# Altium PCB ToolDoorController.PcbDoc
Units mil, origin at the board's own origin, x right, y up, seen from the top; angles counter-clockwise.
Board outline 1968.5 x 3937.01 mil, 2 copper layers (Top Layer, Bottom Layer); 37 components, 64 nets, 298 pads, 301 vias.
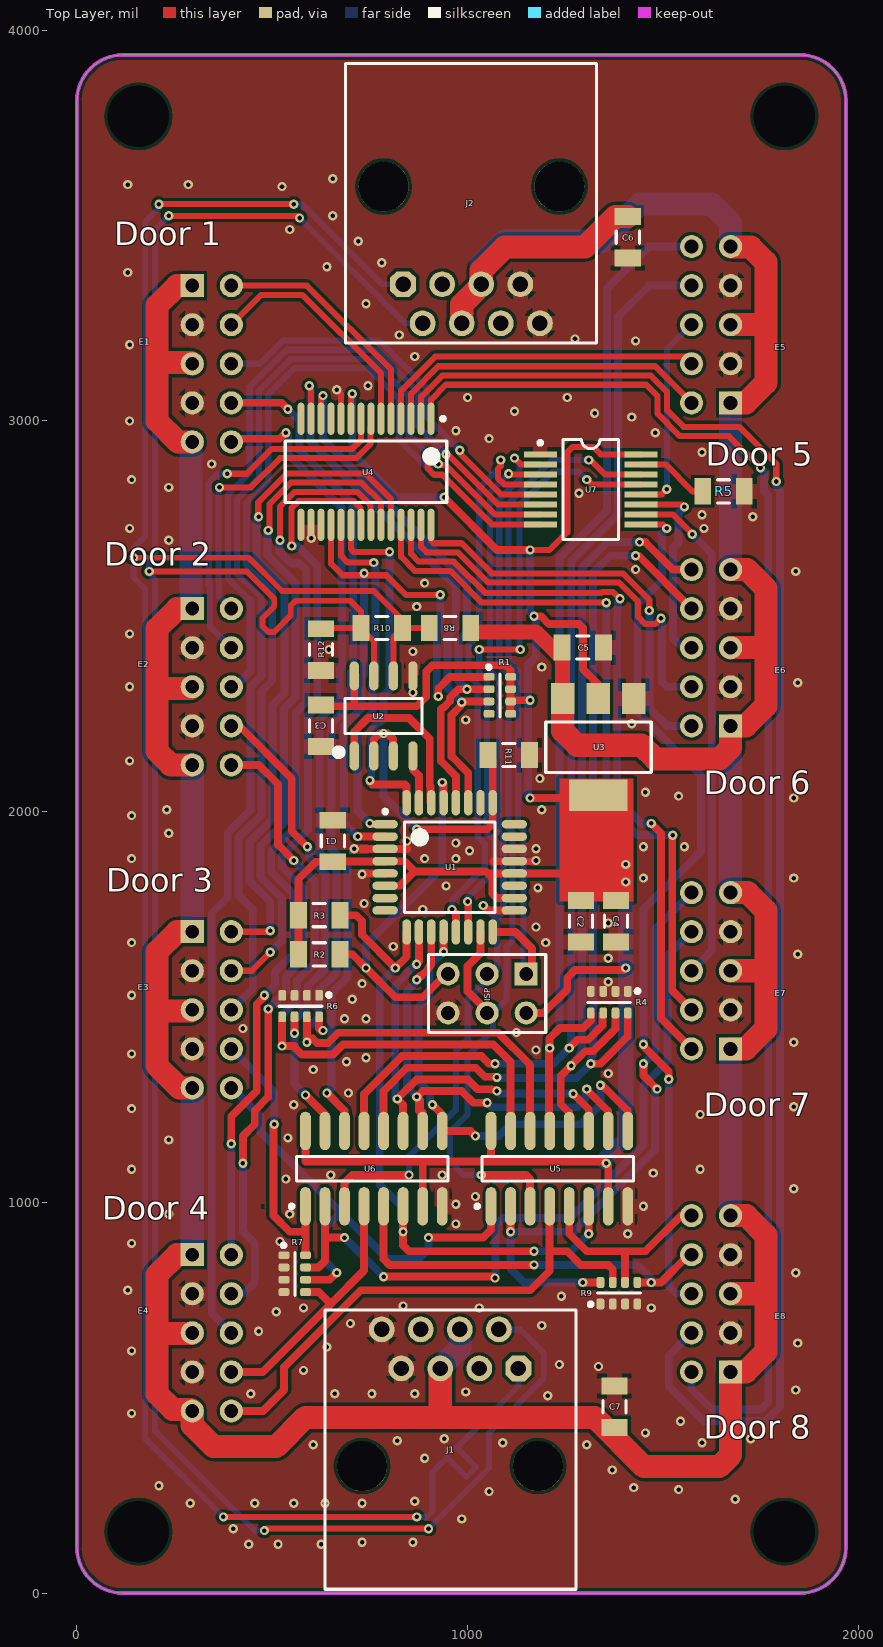
[diagram p0: Top Layer view]
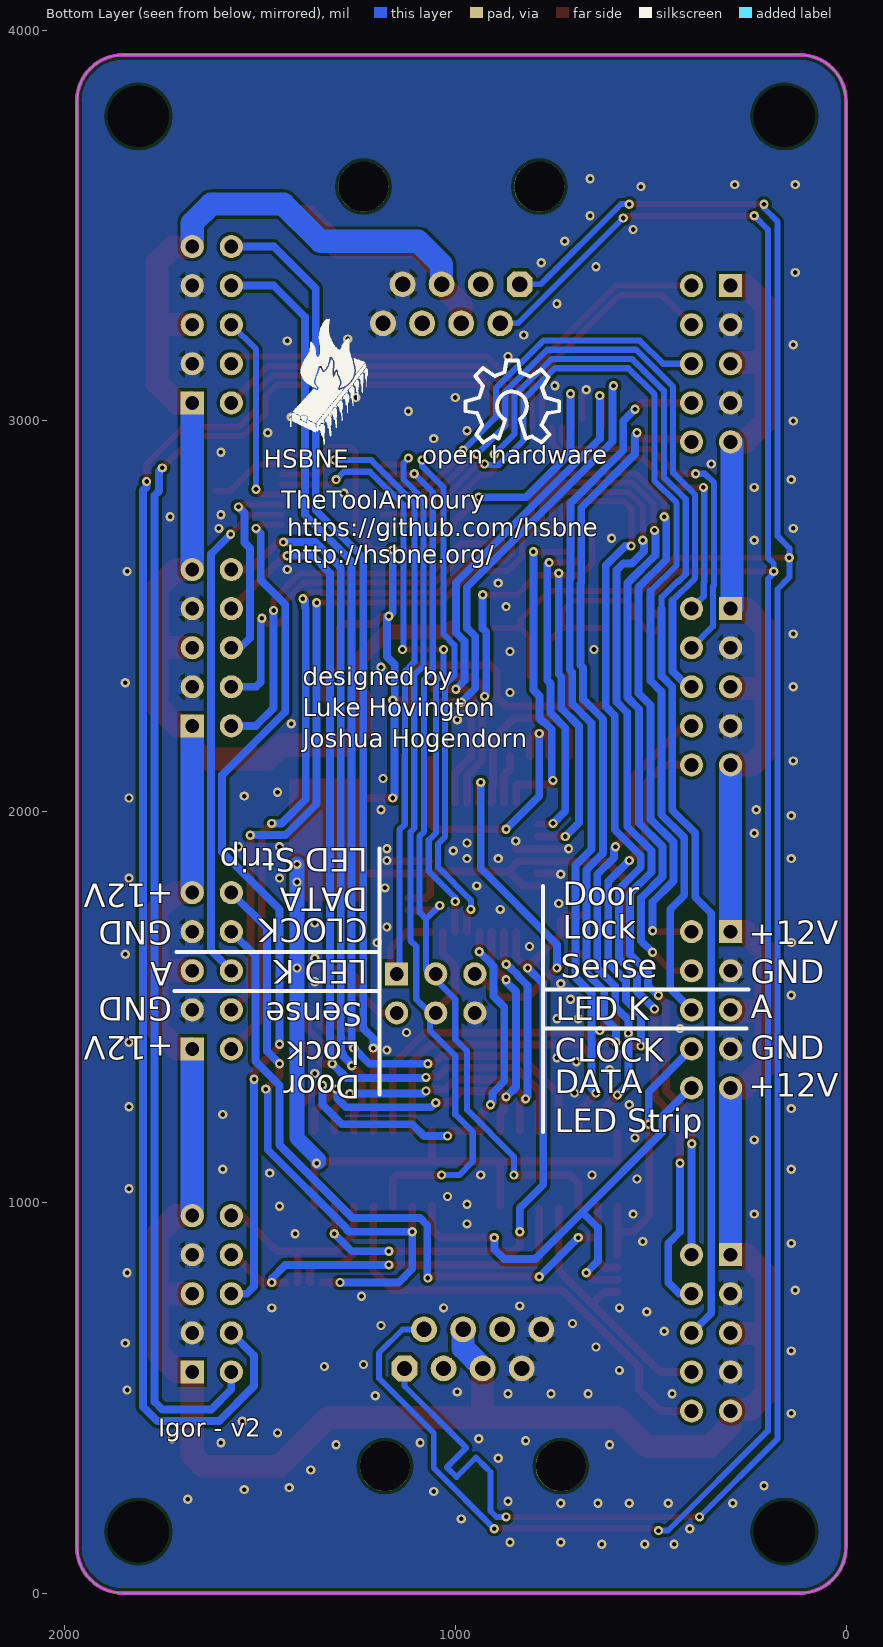
[diagram p1: Bottom Layer view, seen from below]

## Layer stack, top to bottom
Top Solder: solder mask 0.4, Solder Resist, Dk 3.5
Top Layer: signal copper 1.4
Dielectric1: dielectric 12.6, FR-4, Dk 4.8
Bottom Layer: signal copper 1.4
Bottom Solder: solder mask 0.4, Solder Resist, Dk 3.5

## Board outline
118.11,0 cw(c118.11,118.11) 0,118.11 0,3818.9 cw(c118.11,3818.9) 118.11,3937.01 1850.39,3937.01 cw(c1850.39,3818.9) 1968.5,3818.9 1968.5,118.11 cw(c1850.39,118.11) 1850.39,0

## Design rules (kind name [scope] priority, off if disabled: settings)
Clearance [All] p1: gap=7.87
DiffPairsRouting [All] p1: maxlimit=10 minlimit=10 mostfreqgap=10 toplayer_minwidth=15 toplayer_maxwidth=15 toplayer_prefwidth=15 bottomlayer_minwidth=15 bottomlayer_maxwidth=15 bottomlayer_prefwidth=15 maxuncoupledlength=500
HoleSize [All] p1: absolutevalues=TRUE maxlimit=157.48 minlimit=11.81 maxpercent=80.000 minpercent=20.000
MatchedLengths [InDifferentialPair('RS485')] p1: tolerance=78.74 checknetsindiffpair=FALSE checkdiffpairvsdiffpair=TRUE checkxsignals=TRUE checkothers=TRUE
MinimumSolderMaskSliver [(InComponent('U1') OR InComponent('U4') OR InComponent('Y1'))] p1: minsoldermaskwidth=1.77
MinimumSolderMaskSliver MinimumSolderMaskSliver_1 [All] p2: minsoldermaskwidth=9.84
PolygonConnect PolygonConnect_1 [isvia] p1: connectstyle=Direct reliefconductorwidth=10 reliefentries=4 polygonreliefangle="90 Angle" airgapwidth=10
PolygonConnect [All] p2: connectstyle=Relief reliefconductorwidth=39.37 reliefentries=4 polygonreliefangle="90 Angle" airgapwidth=10
RoutingVias [All] p1: holewidth=11.81 width=19.68 viastyle="Through Hole" minholewidth=7.87 minwidth=19.68 maxholewidth=28 maxwidth=50
SilkToSolderMaskClearance [IsPad] p1 off: minsilkscreentomaskgap=10 clearancetoexposedcopper=TRUE
SolderMaskExpansion [All] p1: expansion=4
Width [All] p1: maxlimit=59.06 minlimit=10 preferedwidth=20 minimp=50.000000 maximp=50.000000 favimp=50.000000
26 further rules are at their usual default settings.

## Classes and differential pairs
component class Connectors: E1 E2 E3 E4 E5 E6 E7 E8 J1 J2
component class ToolDoorController: C1 C2 C3 C4 C5 C6 C7 ISP J3 R1 R2 R3 R4 R5 R6 R7 R8 R9 R10 R11 R12 U1 U2 U3 U4 U5 U6 U7
differential pair RS485: +RS485_P -RS485_N

## Components (designator, comment, footprint, x,y, rotation, side; value= is the part's Value field where it differs from the comment)
C1 "100nF" C1206 655,1925 r270 top
C2 "100nF" C1206 1290,1720 r90 top
C3 "100nF" C1206 625,2220 r90 top
C4 "1uF" C1206 1380,1720 r90 top
C5 "1uF" C1206 1295,2420 r180 top
C6 "100nF" C1206 1410,3470 r90 top
C7 "100nF" C1206 1375.76,477.21 r270 top
E1 "Header 2x5" 2X5 295.28,3346.46 r0 top locked
E2 "Header 2x5" 2X5 295.28,2519.68 r0 top locked
E3 "Header 2x5" 2X5 295.28,1692.91 r0 top locked
E4 "Header 2x5" 2X5 295.28,866.14 r0 top locked
E5 "Header 2x5" 2X5 1673.23,3046.46 r180 top locked
E6 "Header 2x5" 2X5 1673.23,2219.68 r180 top locked
E7 "Header 2x5" 2X5 1673.23,1392.91 r180 top locked
E8 "Header 2x5" 2X5 1673.23,566.14 r180 top locked
ISP "ISP" HDR2X3 1150,1585 r180 top
J1 "rs485" RJ45 955,325 r0 top
J2 "rs485" RJ45 1010,3600 r180 top
R1 "10K" SO8_S 1055,2345 r0 top
R2 "10K" C1206 620,1635 r180 top
R3 "10K" C1206 620,1735 r180 top
R4 "10K" SO8_S 1410,1540 r270 top
R5 "?K" C1206 1655,2820 r180 top
R6 "10K" SO8_S 620,1530 r270 top
R7 "10K" SO8_S 530,865 r0 top
R8 "390R" C1206 955,2470 r0 top
R9 "10K" SO8_S 1340,740 r90 top
R10 "220R" C1206 780,2470 r0 top
R11 "10K" C1206 1105,2145 r180 top
R12 "390R" C1206 625,2415 r90 top
U1 "ATmega8-16AC" 32A_N 954.25,1857.63 r0 top
U2 "MAX14770EESA+" 8S1_L 785,2245 r90 top
U3 "AZ1117EH-5" SOT-223 1425,2290 r180 top
U4 "MCP23017T-E/SS" SSOP-SS28_N 740,2870 r270 top
U5 "8-channel multiplexer" 16S1_M 1060,990 r90 top
U6 "8-channel multiplexer" 16S1_M 585,990 r90 top
U7 "TLC5916IDR" DB016 1315,2825 r270 top

## Footprints (in the part's own frame and the unit in brackets; to place one, negate y for a bottom-side part, rotate by r counter-clockwise, add the part's x,y. Pads: shape width x height; smd on the part's side, far side on the other; paste and mask are expansions set on the pad)
2X5 [mm]
  rect 1.5x1.5 hole 0.9: 1(0,0)
  round 1.5 hole 0.9: 2(0,-2.54) 3(0,-5.08) 4(0,-7.62) 5(0,-10.16) 6(2.54,0) 7(2.54,-2.54) 8(2.54,-5.08) 9(2.54,-7.62) 10(2.54,-10.16)
  body extent -9.74,-8.51 2.89,1.25, height 5.79
8S1_L [mm] "SOIC, 8-Leads, Body 4.9x3.9mm, Pitch 1.27mm, IPC High Density"
  oval 1.9x0.6 smd: 1(-2.604,1.905) 2(-2.604,0.635) 3(-2.604,-0.635) 4(-2.604,-1.905) 5(2.604,-1.905) 6(2.604,-0.635) 7(2.604,0.635) 8(2.604,1.905)
  silkscreen extent -2.56,-2.5 1.14,3.12, body extent -2,-2.5 2,2.5, height 1.75
16S1_M [mm] "SOIC, 14-Leads, Body 8.7x3.9mm, Pitch 1.27mm, IPC Low Density"
  oval 2.5x0.7 smd: 1(0,0) 2(0,-1.27) 3(0,-2.54) 4(0,-3.81) 5(0,-5.08) 6(0,-6.35) 7(0,-7.62) 8(0,-8.89) 9(4.9,-8.89) 10(4.9,-7.62) 11(4.9,-6.35) 12(4.9,-5.08) 13(4.9,-3.81) 14(4.9,-2.54) 15(4.9,-1.27) 16(4.9,0)
  silkscreen extent -0.12,-9.27 3.25,1.02, body extent 0.45,-9.4 4.45,0.57, height 1.75
32A_N [mm] "Thin QFP, 32-Leads, Body 7x7mm, Pitch 0.8mm, IPC Medium Density"
  oval 1.65x0.55 smd: 1(-4.2,2.8) 2(-4.2,2) 3(-4.2,1.2) 4(-4.2,0.4) 5(-4.2,-0.4) 6(-4.2,-1.2) 7(-4.2,-2) 8(-4.2,-2.8) 17(4.2,-2.8) 18(4.2,-2) 19(4.2,-1.2) 20(4.2,-0.4) 21(4.2,0.4) 22(4.2,1.2) 23(4.2,2) 24(4.2,2.8)
  oval 0.55x1.65 smd: 9(-2.8,-4.2) 10(-2,-4.2) 11(-1.2,-4.2) 12(-0.4,-4.2) 13(0.4,-4.2) 14(1.2,-4.2) 15(2,-4.2) 16(2.8,-4.2) 25(2.8,4.2) 26(2,4.2) 27(1.2,4.2) 28(0.4,4.2) 29(-0.4,4.2) 30(-1.2,4.2) 31(-2,4.2) 32(-2.8,4.2)
  silkscreen extent -4.32,-2.95 2.95,3.75, body extent -3.5,-3.5 3.5,3.5, height 1.2
C1206 [mm] "Chip Capacitor, Body 3.2x1.6mm, IPC High Density"
  rect 1.1x1.7 smd: 1(-1.35,0) 2(1.35,0)
  silkscreen extent -0.4,-0.75 0.4,0.75, body extent -1.7,-0.9 1.7,0.9, height 1.3
DB016 [mm] "SSOP, Plastic; 16 Leads; Body Width 5.3 mm; Pitch 0.65 mm"
  rect 0.4x2.15 smd: 1(-2.275,-3.275) 2(-1.625,-3.275) 3(-0.975,-3.275) 4(-0.325,-3.275) 5(0.325,-3.275) 6(0.975,-3.275) 7(1.625,-3.275) 8(2.275,-3.275) 9(2.275,3.275) 10(1.625,3.275) 11(0.975,3.275) 12(0.325,3.275) 13(-0.325,3.275) 14(-0.975,3.275) 15(-1.625,3.275) 16(-2.275,3.275)
  silkscreen extent -3.25,-3.4 3.25,1.8, body extent -2.54,-2.29 2.54,2.29, height 1.2
HDR2X3 [mm] "Connector; Header; 3x2 Position"
  rect 1.5x1.5 hole 0.9: 1(0,0)
  round 1.5 hole 0.9: 2(0,2.54) 3(2.54,0) 4(2.54,2.54) 5(5.08,0) 6(5.08,2.54)
  silkscreen extent -1.27,-1.27 6.35,3.81
RJ45 [mil] "609-5081-ND"
  oct 66x66 hole 39.37: 1(175.04,250)
  round 66 hole 39.37: 2(125.04,350) 3(75.04,250) 4(25.04,350) 5(-24.96,250) 6(-74.96,350) 7(-124.96,250) 8(-174.96,350)
  round 127.95 hole 127.95 unplated: ""(-225.04,0) ""(225.04,0)
  silkscreen extent -320,-315 323,400, body extent -295,-314 303,394, height 452
SO8_S [mm] "SOIC, 8-Leads, Body 4.9x3.9mm, Pitch 1.27mm, IPC Low Density"
  rrect50% 0.7x0.5 smd: 1(0,0) 2(0,-0.8) 3(0,-1.6) 4(0,-2.4) 5(1.4,-2.4) 6(1.4,-1.6) 7(1.4,-0.8) 8(1.4,0)
  silkscreen extent -0.15,-2.62 0.71,0.76, body extent -0.05,-2.88 1.43,0.58, height 0.53
SOT-223 [mil]
  rect 60x80 smd: 1(0,0) 2(91,0) 3(182,0)
  rect 150x80 smd: 4(91,248)
  silkscreen extent -45,60 225,190, body extent -38,-7 218,267, height 63
SSOP-SS28_N [mm] "SOP, 28-Leads, Body 10.2x5.2mm, Pitch 0.65mm, IPC Medium Density"
  oval 2.1x0.45 smd: 1(-3.45,4.225) 2(-3.45,3.575) 3(-3.45,2.925) 4(-3.45,2.275) 5(-3.45,1.625) 6(-3.45,0.975) 7(-3.45,0.325) 8(-3.45,-0.325) 9(-3.45,-0.975) 10(-3.45,-1.625) 11(-3.45,-2.275) 12(-3.45,-2.925) 13(-3.45,-3.575) 14(-3.45,-4.225) 15(3.45,-4.225) 16(3.45,-3.575) 17(3.45,-2.925) 18(3.45,-2.275) 19(3.45,-1.625) 20(3.45,-0.975) 21(3.45,-0.325) 22(3.45,0.325) 23(3.45,0.975) 24(3.45,1.625) 25(3.45,2.275) 26(3.45,2.925) 27(3.45,3.575) 28(3.45,4.225)
  silkscreen extent -3.57,-5.25 2,5.25, body extent -2.8,-5.25 2.8,5.25, height 2

## Part data
C1 C2 C3 C6 C7: library part "Cap 100nF", "Capacitor (Semiconductor SIM Model)"
C4 C5: library part "Cap 1uF", "Capacitor (Semiconductor SIM Model)"
E1 E2 E3 E4 E5 E6 E7 E8: library part "Header 2x5a", "Header"
ISP: library part "Header 3X2", "Header, 3-Pin, Dual row"
J1 J2: library part rj45, "rj45"
R1 R4 R6 R7 R9: library part "Resistor Pack", "Isolated Resistor Network - Parts"
R2 R3 R5 R11: library part Resistor-10K, "Resistor"
R8 R12: library part Resistor-390R, "Resistor"
R10: library part Resistor-220R, "Resistor"
U1: "8-Bit AVR Microcontroller with 8K Bytes of In-System Programmable Flash Memory"
U2: "TXRX PROFIBUS RS-485 8-SOIC"
U3: library part AZ1117EH, "Reg 1A 5V OUT SIP VERT"
U4: library part CMP-0186-00065-2, "16-Bit I/O Expander with Serial Interface, 28-Pin SSOP, Extended Temperature, Tape and Reel"
U5 U6: "8-channel analog multiplexer/demultiplexer"
U7: "IC LED DRIVER LIN 120MA"

## Free pads (board coordinates)
  round 60 hole 157.48 unplated: ""(157.48,157.48) ""(157.48,3779.53) ""(1811.02,157.48) ""(1811.02,3779.53)

## Via types
v1: diameter 23.62, hole 11.81, Top Layer to Bottom Layer, tented both sides, 301 vias

## Nets (pads, with @x,y where several pads share a name; then routed paths per layer and width w, separated by ;. In a path a pad name is that pad's centre, name@x,y a point inside that pad or via, vN(x,y) a via of type N, cw(c..) or ccw(c..) an arc to the next point about the centre after c; other vN are vias at no path point)
5V: C1.2 C2.2 C3.2 C4.2 ISP.2 R1.5 R1.6 R1.7 R1.8 R2.2 R3.2 U1.4 U1.6 U1.18 U1.20 U2.8 U3.2 U3.4 U4.9 U5.7 U5.16 U6.7 U6.16 U7.16 | length 6759.5
  Top Layer w15.75: U4.9@701.61,2983.86 U4.9 701.61,3066.61 v1(705,3070) ; v1(1160,2670) 1210,2670 1255,2715 1255,2920 1268.65,2933.65 1321.35,2933.65 1340.43,2914.57 U7.16
  Top Layer w20: R2.2 R3.2 566.85,1826.85 611.85,1871.85 685,1871.85 685,1872.55 788.07,1872.55 U1.4 838.5,1873.37 864.25,1847.63 ; U6.16@585,1177.91 585,1105 885,1105 ; C3.2 628.15,2270 710,2270 ; U2.8 710,2270 ; U1.6 827.01,1810.38 864.25,1847.63 ; U6.7 885,1105 ; v1(940,2805) 1075,2670 v1(1160,2670) ; U5.16 1060,1105 ; R1.5 R1.8 1110.12,2361.68 1096.79,2375 910,2375 894.01,2359.01 894.01,2294.01 870,2270 710,2270 ; R1.6@1113.11,2285 v1(1160,2285) ; U1.18 1075.2,1778.89 1063.94,1790.15 1063.94,1829.92 1054.25,1839.61 ; v1(1160,2035) 1327,2035 U3.4 ; ISP.2@1165,1485 1195,1485 1255,1545 1255,1575 1274.68,1594.68 1399.68,1594.68 v1(1405,1600) ; v1(1170,2500) 1188.12,2500 1208.12,2480 1285,2480 1295,2470 1295,2365 1334,2326 U3.2 ; 1302.6,1841.88 U1.20 1056.52,1841.88 1054.25,1839.61 ; U5.7 1360,1095 v1(1355,1100) 1350,1105 1060,1105 ; 864.25,1847.63 864.57,1847.31 1046.55,1847.31 1054.25,1839.61 ; 885,1105 1060,1105
  Top Layer w39.37: v1(1405,1820) v1(1405,1865)
  Bottom Layer w20: v1(705,3070) 705,2918.84 818.84,2805 v1(940,2805) ; ISP.2@1155,1485 ISP.2@1165,1485 ; v1(1160,2035) 1155,2040 1155.31,2040.32 1155.31,2280.32 v1(1160,2285) 1155,2285 1154.84,2285.16 1154.84,2376.82 1175,2396.98 1175,2500 v1(1170,2500) 1160,2510 v1(1160,2670)
  Bottom Layer w39.37: v1@1351.07,1103.93 1351.07,1111.07 1405,1165 v1(1405,1820) v1(1405,1865)
12V: C5.2 C6.2 C7.2 E1.1 E1.3 E1.5 E2.1 E2.3 E2.5 E3.1 E3.3 E3.5 E4.1 E4.3 E4.5 E5.1 E5.3 E5.5 E6.1 E6.3 E6.5 E7.1 E7.3 E7.5 E8.1 E8.3 E8.5 J1.4 J1.5 J2.4 J2.5 R8.2 U3.3 | length 11871.1
  Top Layer w39.37: R8.2 1018.15,2460 1175,2460 1243,2392 U3.3
  Top Layer w59.06: E4.3 294.13,665 205,665 ; E4.1 256.46,866.14 205,814.69 205,665 ; E3.5 262.09,1292.91 205,1350 205,1490 ; E3.3 292.36,1490 205,1490 ; E3.1 256.46,1692.91 205,1641.46 205,1490 ; E2.5 240.32,2119.68 205,2155 205,2315 ; E2.3 290.59,2315 205,2315 ; E2.1 256.46,2519.68 205,2468.23 205,2315 ; E1.5 258.54,2946.46 205,3000 205,3150 ; E1.3 291.73,3150 205,3150 ; E1.1 256.46,3346.46 205,3295 205,3150 ; J1.5 930.04,450.04 930,450 ; J2.4 984.96,3297.65 1034.96,3347.65 J2.5 1034.96,3384.96 1095,3445 1300,3445 1378.15,3523.15 C6.2 ; U3.3 1243,2207 1280,2170 1445,2170 1480,2135 1645,2135 1673.23,2163.23 E6.1 1712.05,2219.68 1763.5,2271.14 1763.5,2420 ; E8.3 1759.65,766.14 1763.5,770 ; E8.5 1713.86,966.14 1763.5,916.5 1763.5,770 ; E7.1 1712.05,1392.91 1763.5,1444.37 1763.5,1595 ; E7.3 1761.42,1592.91 1763.5,1595 ; E7.5 1717.09,1792.91 1763.5,1746.5 1763.5,1595 ; E6.3 1673.54,2420 1763.5,2420 ; E6.5 1715.32,2619.68 1763.5,2571.5 1763.5,2420 ; E5.1 1712.05,3046.46 1763.5,3097.91 1763.5,3250 ; E5.3 1759.96,3246.46 1763.5,3250 ; E5.5 1674.68,3445 1725,3445 1763.5,3406.5 1763.5,3250 ; 205,665 205,510 245,470 291.42,470 E4.5 295.28,429.72 350,375 510,375 585,450 930,450 ; 930,450 1325,450 1451.38,323.62 1643.62,323.62 1673.23,353.23 E8.1 1712.05,566.14 1763.5,617.6 1763.5,770
  Bottom Layer w59.06: E4.1 E3.5 ; E3.1 E2.5 ; E2.1 292.17,2522.8 292.17,2943.35 E1.5 ; J1.5 930.04,577.35 980.04,627.35 J1.4 ; J2.5 1034.96,3399.96 1095,3460 1345,3460 1440,3555 1625,3555 1673.23,3506.77 E5.5 ; E8.5 E7.1 ; E7.5 E6.1 ; E6.5 E5.1
AK1: E1.8 U7.5 | length 1026.8
  Top Layer w15.75: v1(980,2925) 980,2917.62 1085.41,2812.2 U7.5
  Bottom Layer w15.75: E1.8 468.05,3146.46 527.46,3205.87 774.35,3205.87 895.87,3084.35 895.87,3009.13 v1(980,2925)
AK2: E2.8 U7.6 | length 1838.5
  Top Layer w15.75: v1(945,2915) 949.21,2915 1077.6,2786.61 U7.6
  Bottom Layer w15.75: 444.25,2540.15 386.38,2598.02 386.38,2811.38 442.5,2867.5 442.5,3087.5 537.24,3182.24 764.57,3182.24 872.24,3074.57 872.24,2987.76 v1(945,2915)
  Bottom Layer w20: E2.8 404.83,2319.68 444.25,2359.1 444.25,2540.15
AK3: E3.8 U7.7 | length 2641.1
  Top Layer w15.75: v1(925,2890) 927.56,2887.44 943.37,2887.44 1069.78,2761.02 U7.7
  Bottom Layer w15.75: 500,2565 433.62,2631.38 433.62,2790.22 489.74,2846.34 489.74,3067.93 556.81,3135 745,3135 825,3055 825,2951.03 888.58,2887.44 922.44,2887.44 v1(925,2890)
  Bottom Layer w20: E3.8 450,1547.64 450,1750 413.82,1786.18 413.82,1933.82 472.44,1992.44 472.44,2307.44 500,2335 500,2565
AK4: E4.8 U7.8 | length 3547.7
  Top Layer w15.75: v1(900,2915) 897.44,2912.44 897.44,2878.58 913.58,2862.44 934.96,2862.44 1061.97,2735.43 U7.8
  Bottom Layer w15.75: 472.13,2520 472.13,2548.69 430.81,2590 427.81,2590 410,2607.81 410,2800 466.12,2856.12 466.12,3077.72 547.03,3158.62 754.78,3158.62 848.62,3064.78 848.62,2966.38 v1(900,2915)
  Bottom Layer w20: E4.8 345,716.42 345,1740 385.94,1780.94 385.94,1945.36 444.57,2003.99 444.57,2320 471.11,2346.55 472.13,2346.55 472.13,2520
AK5: E5.8 U7.12 | length 519
  Top Layer w15.75: U7.12 1497.2,2812.2 v1(1510,2825)
  Bottom Layer w15.75: v1(1510,2825) 1510,3183.23 E5.8
AK6: E6.8 U7.11 | length 519.3
  Top Layer w15.75: U7.11 1548.39,2786.61 v1(1555,2780)
  Bottom Layer w20: v1(1555,2780) 1539.68,2764.68 1539.68,2688.94 1525.75,2675 1525.75,2444.25 1550.31,2419.68 E6.8
AK7: E7.8 U7.10 | length 1312.2
  Top Layer w15.75: U7.10 1525.29,2761.02 1575,2711.31 v1(1575,2710)
  Bottom Layer w20: E7.8 1625,1644.69 1625,2660 v1(1575,2710)
AK8: E8.8 U7.9 | length 2262.2
  Top Layer w15.75: U7.9 1499.57,2735.43 v1(1510,2725)
  Top Layer w20: v1(1450,1405) 1450,1400 1515,1335 v1(1515,1315)
  Bottom Layer w20: v1(1450,1405) 1450,1750 1597.13,1897.13 1597.13,2093.61 1435.31,2255.42 1435.31,2530.32 1497.87,2592.87 1497.87,2712.87 v1(1510,2725) ; v1(1515,1315) 1515,785 1533.86,766.14 E8.8
COM_TR: R11.2 U1.25 U2.2 U2.3 | length 793.3
  Top Layer w20: U2.2 760,2185 775,2200 v1(785,2200) 795,2200 809.02,2185.98 809.02,2141.5 U2.3 ; v1(870,1955) 1050,1955 1064.49,1969.49 U1.25 R11.2@1064.49,2132.64
  Bottom Layer w20: v1(785,2200) 785,2040 v1(870,1955)
DR1: E1.6 U4.5 | length 645.1
  Top Layer w15.75: E1.6 588.54,3346.46 803.98,3131.02 U4.5 U4.5@803.98,2983.86
DR2: E2.6 U4.7 | length 800.3
  Top Layer w15.75: v1(365,2830) 445,2830 520,2905 715,2905 751.81,2941.81 751.81,2982.87 U4.7@752.8,2983.86
  Bottom Layer w15.75: v1(365,2830) 362.76,2827.76 362.76,2588.24 364.17,2586.82 364.17,2550.79 E2.6
DR3: E3.6 U4.24 | length 1769.8
  Top Layer w15.75: E3.6 492.91,1692.91 v1(495,1695) ; v1@464.13,2755 464.13,2792.14 537.86,2865.87 737.42,2865.87 804.13,2799.15 804.13,2716.3 U4.24@803.98,2716.14
  Bottom Layer w20: v1(465,2755) 460,2750 460,2645 531.38,2573.62 531.38,2303.72 500.31,2272.65 500.31,1980.9 441.69,1922.27 441.69,1822.73 495,1769.42 v1(495,1695)
DR4: E4.6 U4.22 | length 2415.2
  Top Layer w15.75: v1(520,2695) 520,2781.2 557.42,2818.62 717.85,2818.62 751.81,2784.66 751.81,2717.13 U4.22@752.8,2716.14
  Top Layer w20: v1(395,1150) 395,1220 460.31,1285.32 460.31,1507.3 480,1526.98 v1(480,1530)
  Bottom Layer w20: v1(395,1150) 395.28,1149.72 E4.6 ; v1(480,1530) 482.13,1530 507.13,1555 507.13,1589.59 552.87,1635.34 552.87,1791.05 497.44,1846.49 497.44,1899.18 560,1961.74 560,2253.5 587.13,2280.63 587.13,2618.45 570.29,2635.29 548.55,2635.29 517.08,2666.76 517.08,2692.08 v1(520,2695)
DR5: E5.6 U4.3 | length 872
  Top Layer w15.75: U4.3@855.16,2983.86 855.16,3070.16 925,3140 1479.68,3140 E5.6
DR6: E6.6 U4.28 | length 1066.1
  Top Layer w15.75: U4.28 906.34,2693.77 912.87,2687.24 984.57,2687.24 1061.81,2610 1290,2610 1290.2,2609.8 1397.58,2609.8 1465,2542.38 v1(1465,2515)
  Bottom Layer w20: v1(1465,2515) 1465.31,2514.68 1465.31,2264.84 1510.47,2219.68 E6.6
DR7: E7.6 U4.26 | length 1904.4
  Top Layer w15.75: U4.26@855.16,2731.14 855.16,2659.84 875,2640 965,2640 1045,2560 1341.03,2560 1343.58,2562.56 1371.42,2562.56 1388.97,2545 v1(1390,2545)
  Top Layer w20: v1(1470,1970) 1495.31,1944.68 1495.31,1470.83 E7.6
  Bottom Layer w20: v1(1390,2545) 1384.68,2539.68 1384.68,2522.7 1382.87,2520.89 1382.87,2032.13 1445,1970 v1(1470,1970)
DR8: E8.6 U4.1 | length 3691.3
  Top Layer w15.75: U4.1 906.34,3054.53 944.57,3092.76 1457.24,3092.76 1486.38,3063.62 1486.38,3018.62 1543.62,2961.38 1668.39,2961.38 v1(1749.76,2880)
  Bottom Layer w20: E8.6 1573.23,521.77 1625,470 1750,470 1769.53,489.53 1769.53,2809.53 1758.35,2820.71 1758.35,2871.42 v1(1749.76,2880)
GND: C1.1 C2.1 C3.1 C4.1 C5.1 C6.1 C7.1 E1.2 E1.4 E2.2 E2.4 E3.2 E3.4 E4.2 E4.4 E5.2 E5.4 E6.2 E6.4 E7.2 E7.4 E8.2 E8.4 ISP.6 J1.7 J1.8 J2.7 J2.8 R4.1 R4.2 R4.3 R4.4 R5.1 R6.1 R6.2 R6.3 R6.4 R7.1 R7.2 R7.3 R7.4 R9.1 R9.2 R9.3 R9.4 R11.1 R12.1 U1.3 U1.5 U1.21 U1.22 U2.5 U3.1 U4.10 U4.15 U4.16 U4.17 U5.8 U6.8 U7.1 | length 343.9
  Top Layer w15.75: 675,3070 676.02,3068.98 U4.10
  Top Layer w20: 730,1904.71 788.9,1904.71 U1.3 844.87,1904.87 845,1905 ; v1@735,1840 736.88,1841.88 U1.5 ; 1066.63,1873.37 U1.21 1173.37,1873.37 v1(1175,1875)
  Top Layer w59.06: E4.4@295,565.87 E4.4
  other v1: 440,125 515,125 625,125 730,130 860,130 400,165 985,190 290,230 455,230 555,230 635,230 730,230 865,235 1685,240 1055,260 1540,265 1425,270 210,275 1370,315 890,345 605,380 1305,380 1090,385 1600,385 820,390 940,395 1725,395 1455,410 1545,440 140,460 1205,505 445,510 660,510 755,510 865,510 995,515 1840,520 580,570 1335,580 1235,585 140,620 640,630 1845,640 465,670 1190,685 700,690 510,720 580,730 1030,730 1470,730 835,735 1240,760 130,775 1840,820 140,895 520,900 1410,920 970,945 235,970 545,970 1450,990 970,995 1020,1015 1835,1035 535,1060 650,1070 935,1070 1475,1075 140,1085 1595,1085 235,1160 540,1165 1595,1225 140,1240 1835,1245 555,1250 695,1280 1360,1330 605,1340 690,1360 740,1370 140,1380 1175,1390 1835,1410 1125,1435 425,1445 685,1470 740,1470 705,1520 140,1530 730,1560 1360,1565 1360,1625 1845,1635 810,1655 140,1665 1200,1665 1175,1705 1360,1715 885,1750 735,1765 1180,1805 945,1810 1450,1830 1835,1830 730,1840 140,1880 890,1880 970,1880 1005,1900 710,1905 1175,1905 1450,1910 1555,1910 970,1920 845,1925 235,1945 140,1990 230,2005 1190,2005 1835,2035 1540,2040 1455,2050 1185,2085 135,2130 1420,2225 995,2235 860,2305 135,2320 1845,2330 1190,2370 860,2410 645,2415 135,2455 870,2525 890,2585 1840,2615 1430,2620 235,2695 600,2700 135,2725 1605,2725 1730,2755 1600,2760 1285,2815 235,2830 140,2850 345,2890 1600,2920 1055,2955 1480,2970 970,2975 135,3000 1420,3010 1325,3020 1120,3025 1000,3060 1255,3060 665,3080 745,3090 865,3165 135,3195 1430,3205 1275,3210 825,3220 740,3300 130,3380 640,3395 780,3405 720,3460 545,3490 655,3525 525,3600 130,3605 285,3605 655,3620
I\O\R\E\S\E\T: R1.1 U1.2 U4.18 | length 1601.9
  Top Layer w15.75: U4.18@650.43,2716.14 650.43,2634.57 680,2605 791.98,2605 841.98,2555 v1(930,2555)
  Top Layer w20: v1(718.63,1936.37) U1.2 ; v1(925,2295) 925,2315 955,2345 R1.1
  Bottom Layer w20: v1(718.63,1936.37) 683.35,1971.65 683.35,2219.17 728.62,2264.44 728.62,2345.28 735,2351.65 v1(735,2610) ; v1(925,2295) 920.94,2299.05 920.94,2460.17 930,2469.23 v1(930,2555)
INH: R3.1 U1.9 U5.6 U6.6 | length 1708.9
  Top Layer w20: R3.1 715,1735 730,1720 730,1685 v1(815,1600) 844.02,1629.02 U1.9 ; U6.6 v1(835,925) 835,889.84 849.84,875 v1(1170,875) ; v1(1310,920) U5.6
  Bottom Layer w20: v1(815,1600) 775,1560 775,1045 835,985 v1(835,925) ; v1(1170,875) 1265,875 v1(1310,920)
INTA: U1.32 U4.20 | length 916.5
  Top Layer w15.75: U4.20 701.61,2672.26 708.76,2665.12 v1(800,2665.12)
  Top Layer w20: v1(750,2080) 750,2075 755,2070 840,2070 844.02,2065.98 U1.32
  Bottom Layer w20: v1(750,2080) 753.35,2083.35 753.35,2210.33 772.7,2229.68 775.62,2229.68 784.37,2238.43 784.37,2296.02 800,2311.65 v1(800,2665.12)
INTB: U1.1 U4.19 | length 893.9
  Top Layer w15.75: U4.19@676.02,2716.14 676.02,2655 693.46,2637.56 v1(760,2637.56) ; v1(750,1970) 752.14,1967.86 U1.1
  Bottom Layer w20: v1(750,1970) 718.35,2001.65 718.35,2214.75 756.5,2252.9 756.5,2328.15 764.68,2336.34 764.68,2632.87 v1(760,2637.56)
L_L\E\: U1.13 U7.4 | length 1463.4
  Top Layer w15.75: v1(1085,2900) 1085,2885 1077.44,2877.44 1077.44,2853.58 1093.58,2837.44 1186.06,2837.44 U7.4
  Top Layer w20: v1(960,1750) 970,1740 U1.13
  Bottom Layer w15.75: v1(960,1750) 960,1773.41 1044.13,1857.54 1044.13,1917.46 1026.06,1935.53 1026.06,2324.92 1002.44,2348.54 1002.44,2426.42 1030,2453.97 1030,2828.97 1085,2883.97 v1(1085,2900)
L_O\E\: U1.14 U7.13 | length 1602.6
  Top Layer w15.75: v1(1030,2415) v1(1135,2415) ; v1(1305,2850) 1317.2,2837.8 U7.13
  Top Layer w20: v1(1000,1770) 1001.5,1768.5 U1.14
  Bottom Layer w15.75: v1(1000,1770) 1000,1780 1067.76,1847.76 1067.76,1927.24 1049.68,1945.32 1049.68,2334.7 1030,2354.39 v1(1030,2415) ; v1(1135,2415) 1132.44,2417.56 1132.44,2784.03 1218.41,2870 1285,2870 v1(1305,2850)
LD1: E1.10 R6.7 U5.14 | length 2711.7
  Top Layer w20: E1.10 395.28,2954.37 519.37,2954.37 v1(535,2970) ; R6.7@588.66,1474.88 v1(588.66,1410) 598.66,1420 602.8,1420 614.45,1408.35 643.11,1408.35 668.82,1434.05 1077.91,1434.05 1160,1351.97 U5.14
  Bottom Layer w20: E1.10 E1.10@399.54,2950.72 ; v1(535,2970) 540,2965 540,2915.58 677.44,2778.14 677.44,2586.16 679.25,2584.35 679.25,2374.74 672.87,2368.37 672.87,2287.53 621.65,2236.31 621.65,1895 623.62,1893.03 623.62,1891.96 664.37,1851.21 664.37,1587.29 618.62,1541.55 618.62,1473.39 588.66,1443.43 v1(588.66,1410)
LD2: E2.10 R6.5 U5.15 | length 1759.9
  Top Layer w20: E2.10 465.32,2119.68 515,2070 515,1915 v1(555,1875) ; R6.5@525,1474.37 v1(525,1400) 557.01,1400 557.01,1396.89 575.55,1378.35 601.77,1378.35 602.01,1378.58 602.09,1378.5 655.47,1378.5 681.18,1404.21 1065.55,1404.21 1110,1359.76 U5.15
  Bottom Layer w20: v1(525,1400) 525,1479.84 562.87,1517.72 562.87,1566.5 608.62,1612.24 608.62,1821.38 v1(555,1875)
LD3: E3.10 R7.6 U5.1 | length 1249.5
  Top Layer w20: R7.6 647.01,802.01 v1(665,820) ; v1(900,910) 1040,910 1060,930 U5.1
  Bottom Layer w20: E3.10 397.09,1292.91 470,1220 470,1180 675,975 ; v1(665,820) 635,850 635,935 675,975 ; v1(900,910) 900,880 875,855 795,855 675,975
LD4: E4.10 R9.7 U5.4 | length 1376.7
  Top Layer w20: E4.10 476.14,466.14 530,520 530,578.35 726.65,775 1160,775 1210,825 U5.4 ; 1210,875 1255,875 1290,840 1360,840 1371.5,828.5 R9.7
LD5: E5.10 R4.5 U5.13 | length 2647.6
  Top Layer w20: U5.13 1208.5,1184.41 1208.5,1393.5 v1(1210,1395) 1210,1420 1236.34,1446.34 1296.34,1446.34 1315.51,1465.51 R4.5
  Bottom Layer w20: v1(1210,1395) 1210,1420 1235.16,1445.16 1235.16,1447.36 1235.47,1447.68 1235.47,2649.89 1357.13,2771.55 1357.13,3339.02 1464.57,3446.46 E5.10
LD6: E6.10 R4.7 U5.12 | length 2003.5
  Top Layer w20: U5.12 1260,1229.84 1238.35,1251.5 1238.35,1323.66 1301.34,1386.65 1321.06,1386.65 1378.5,1444.1 R4.7 ; v1(1440,2690) 1455,2690 1525.31,2619.68 E6.10
  Bottom Layer w20: v1(1265,1350) 1265,1352.8 1287.13,1374.92 1287.13,1380.15 1289.68,1382.7 1289.68,1385.27 1292.87,1388.45 1292.87,1423.45 1293.19,1423.77 1293.19,2622.61 1295.16,2624.58 1295.16,2627.36 1357.8,2690 v1(1440,2690)
LD7: E7.10 R9.8 U5.2 | length 1583.7
  Top Layer w20: v1@1110,930 U5.2 ; v1(1295,795) 1295.12,795.12 R9.8 ; v1(1450,1355) 1450,1325 v1(1485,1290)
  Bottom Layer w20: v1(1295,795) 1145,795 1110,830 v1(1110,925) 1272.8,925 1278.35,930.55 1278.35,933.11 1479.84,1134.61 1479.84,1284.84 v1(1485,1290) ; v1(1450,1355) 1481.65,1386.65 1481.65,1701.34 E7.10
LD8: E8.10 R9.6 U5.5 | length 516.5
  Top Layer w20: U5.5 1260,920 1305,875 1455,875 1546.14,966.14 E8.10 ; R9.6 1402.99,872.01
LK1: E1.9 R6.8 U6.14 | length 2190
  Top Layer w20: E1.9 523.54,3046.46 v1(540,3030) ; R6.8 620,1445 625,1440 v1(630,1440) ; v1(640,1280) 685,1235 U6.14
  Bottom Layer w20: v1(540,3030) 570,3000 570,2925 705.31,2789.68 705.31,2597.7 707.13,2595.89 707.13,2363.2 700.75,2356.82 700.75,2275.99 651.5,2226.74 651.5,1903.5 692.24,1862.76 692.24,1575.75 651.5,1535 651.5,1291.5 v1(640,1280)
LK2: E2.9 R6.6 U6.15 | length 1255.5
  Top Layer w20: E2.9 415.32,2219.68 550,2085 550,1950 v1(590,1910) ; v1(557.01,1432.99) R6.6 ; v1(585,1275) 635,1225 U6.15
  Bottom Layer w20: v1(585,1275) 557.01,1302.99 v1(557.01,1432.99) 557.01,1467.01 590.75,1500.75 590.75,1553.09 636.5,1598.84 636.5,1839.66 593.78,1882.38 593.78,1906.22 v1(590,1910)
LK3: E3.9 R7.8 U6.1 | length 696.2
  Top Layer w20: v1(505,1200) 503.35,1198.35 503.35,966.65 545,925 585,925 ; R7.8@585,865.12 585,925 ; U6.1 585,925
  Bottom Layer w20: E3.9 505,1283.19 v1(505,1200)
LK4: E4.9 R7.5 U6.4 | length 683.6
  Top Layer w20: E4.9 475.59,566.14 649.45,740 ; R7.5 618.94,770.51 649.45,740 ; U6.4@735,985 735,825.55 649.45,740
LK5: E5.9 R4.6 U6.13 | length 2963.8
  Top Layer w20: U6.13 735,1277.2 832.17,1374.37 1035.63,1374.37 1055,1355 v1(1070,1355) ; v1(1260,1395) 1281.5,1416.5 1308.7,1416.5 1345.35,1453.15 1345.35,1483.23 R4.6
  Bottom Layer w20: v1(1070,1355) 1220,1355 v1(1260,1395) ; v1@1265,1400 1265,1435 1265.31,1435.32 1265.31,2640.32 1385,2760 1385,3266.89 1464.57,3346.46 E5.9
LK6: E6.9 R4.8 U6.12 | length 2454.5
  Top Layer w20: U6.12 785,1285 844.53,1344.53 1020.71,1344.53 1043.74,1321.5 1070.47,1321.5 1073.98,1317.99 1075,1317.99 v1(1075,1320) ; v1(1315,1355) 1340,1355 1410,1425 R4.8 ; v1(1430,2655) 1437.91,2655 E6.9
  Bottom Layer w20: v1(1075,1320) 1076.65,1318.35 1278.35,1318.35 v1(1315,1355) 1315,1368.6 1317.56,1371.16 1317.56,1373.72 1320.75,1376.91 1320.75,1411.91 1321.06,1412.22 1321.06,2611.06 1365,2655 v1(1430,2655)
LK7: E7.9 R7.7 U6.2 | length 1873.9
  Top Layer w20: R7.7 618.5,833.5 635,850 635,910 ; U6.2 635,910 ; v1(685,910) 635,910 ; v1(785,810) 1066.65,810 v1(1070,806.65)
  Bottom Layer w20: v1(685,910) v1(785,810) ; v1(1070,806.65) 1071.65,805 1071.65,941.65 1090,960 1263.03,960 1450,1146.97 1450,1300 1511.5,1361.5 1511.5,1631.18 E7.9
LK8: E8.9 R9.5 U6.5 | length 1039
  Top Layer w20: U6.5@785,985 785,855 800,840 v1(1170,840) ; R9.5 1495.12,795.12 ; v1(1470,795) 1495,795 1495.12,795.12 ; E8.9 1566.14,866.14 1495.12,795.12
  Bottom Layer w20: v1(1170,840) 1435,840 1470,805 v1(1470,795)
M_A: U1.10 U5.11 U6.11 | length 1141.6
  Top Layer w20: U6.11 835,1250 v1(820,1265) 869.68,1314.68 1000.47,1314.68 1025.31,1289.84 1059.92,1289.84 1061.62,1288.15 1071.85,1288.15 v1(1075,1285) ; v1(869.45,1609.45) 874.72,1614.72 874.72,1616.18 875.51,1616.97 U1.10 ; v1(1270,1278.35) 1310,1238.35 U5.11
  Bottom Layer w20: v1(820,1265) 814.84,1270.16 814.84,1554.84 840.31,1580.32 840.31,1582.3 857.7,1599.68 859.68,1599.68 v1(869.45,1609.45) ; v1(1075,1285) 1081.65,1278.35 v1(1270,1278.35)
M_B: U1.11 U5.10 U6.10 | length 1218.4
  Top Layer w20: v1(870,1570) 870,1572.04 877.73,1579.76 881.75,1579.76 899.13,1597.15 899.13,1599.72 902.6,1603.18 902.6,1604.63 907.01,1609.04 U1.11 ; U6.10 U6.10@885,1225 ; v1(1050,1255) 1015,1255 985.16,1284.84 884.84,1284.84 v1(870,1270) v1@875,1265 ; v1(1305,1290) 1305,1288.62 1360,1233.62 U5.10 ; v1@875,1265 875,1235 U6.10@885,1225 ; v1@875,1265 878.35,1261.65 878.35,1236.89 885,1230.24 U6.10@885,1225
  Bottom Layer w20: v1(870,1270) 844.68,1295.32 844.68,1539.68 870,1565 v1(870,1570) ; v1(1050,1255) 1061.65,1243.35 1279.76,1243.35 1301.65,1265.24 1301.65,1286.65 v1(1305,1290)
M_C: U1.12 U5.9 U6.9 | length 1203.4
  Top Layer w20: v1(910,1250) 935,1225 U6.9 1007.09,1182.91 v1(1020,1170) ; v1(938.5,1641.5) U1.12 ; v1(1340,1300) 1345,1300 1410,1235 U5.9
  Bottom Layer w20: v1(910,1250) 904.53,1255.47 904.53,1280.47 874.53,1310.47 874.53,1500 902.6,1528.07 902.6,1604.63 907.01,1609.04 907.01,1610 v1(938.5,1641.5) ; v1(1020,1170) 1080,1170 1110,1200 1290,1200 1340,1250 v1(1340,1300)
MISO: ISP.1 U1.16 U7.14 | length 1812.7
  Top Layer w15.75: v1(1310,2900) 1315,2900 1351.61,2863.39 U7.14
  Top Layer w20: U1.16 1122.73,1692.27 1165,1650 ISP.1@1165,1585
  Bottom Layer w15.75: ISP.1@1165,1585 1142.87,1607.13 1142.87,1953.15 1129.25,1966.77 1129.25,2145 1129.09,2145.16 1129.09,2345 1128.62,2345.47 1128.62,2359.78 1104.8,2383.6 1104.8,2789.8 1215,2900 v1(1310,2900)
MOSI: ISP.4 U1.15 U5.3 U7.2 | length 2526.9
  Top Layer w15.75: v1(1120,2905) 1136.02,2888.98 U7.2
  Top Layer w20: U1.15 1032.99,1637.99 1000,1605 1000,1540 1055,1485 ISP.4@1065,1485 ; v1(1035,1070) 1150,1070 1160,1060 U5.3
  Bottom Layer w15.75: v1(1035,1070) 990,1070 955.24,1104.76 955.24,1180.24 1000,1225 1000,1375 1065,1440 1065,1485 1100,1520 1100,1655 1115,1670 1115,1947.62 1105,1957.62 1105,2350 1081.18,2373.82 1081.18,2800 1081.59,2800 1132.56,2850.97 1132.56,2892.44 v1(1120,2905)
NetR5_2: R5.2 U7.15 | length 196.5
  Top Layer w15.75: U7.15 1506.57,2888.98 1575.55,2820 R5.2@1611.85,2820
RS485_N: J1.1 J2.1 R8.1 R10.2 U2.6 | length 6306.4
  Top Layer w15: v1(145,2650) 440,2650 525,2565 760,2565 833.15,2491.85 R10.2 ; v1(210,3555) v1(555,3555) ; v1(375,195) v1(870,195) ; U2.6 810,2446.85 R10.2 ; R8.1 R10.2
  Bottom Layer w15: v1(210,3555) 210,3545 175,3510 175,2705 145,2675 v1(145,2650) 145,2600 175,2570 175,395 v1(375,195) ; v1(555,3555) 576.1,3555 781.1,3350 J2.1 ; v1(870,195) 894.64,195 910,210.36 910,310 922.37,322.37 947.12,347.12 996.95,297.3 1021.7,322.05 971.87,371.87 995,395 1130.04,530.04 J1.1
RS485_P: J1.2 J2.2 R10.1 R12.2 U2.7 | length 6448.7
  Top Layer w15: v1(185,2615) 435,2615 505,2545 505,2525 475,2495 475,2475 490,2460 505,2460 547.5,2502.5 547.5,2527.5 560,2540 700,2540 726.85,2513.15 R10.1 ; v1(235,3525) 564.64,3525 v1(570,3519.64) ; v1(480,160) 485,165 v1(900,165) ; R12.2@626.85,2470 R10.1 ; U2.7 760,2436.85 R10.1
  Bottom Layer w15: v1(235,3525) 200,3490 200,2650 185,2635 v1(185,2615) 185,2610 200,2595 200,415.36 455.36,160 v1(480,160) ; v1(570,3519.64) 839.64,3250 J2.2 ; v1(900,165) 1055,320 1055,410 1195,550 1195,615 1135.34,674.66 1079.7,674.66 J1.2
RST: ISP.5 R2.1 U1.29 | length 972.6
  Top Layer w20: R2.1 705,1635 v1(740,1600) 815,1525 885,1525 945,1585 ISP.5@965,1585 ; v1(935,2075) 938.5,2071.5 U1.29 U1.29@939.25,2023.73
  Bottom Layer w20: v1(740,1600) 740,1660 935,1855 v1(935,2075)
RXD: U1.30 U2.1 | length 457.6
  Top Layer w20: U2.1 710,2205 745,2240 850,2240 903.35,2186.65 903.35,2066.97 905.31,2065 905.31,2024.67 U1.30
SCK: ISP.3 U1.17 U6.3 U7.3 | length 2378.2
  Top Layer w15.75: v1(1105,2865) 1106.61,2863.39 U7.3
  Top Layer w20: U6.3 685,1050 705,1070 v1(850,1070) ; v1(1040,1760) 1052.61,1747.39 U1.17
  Bottom Layer w15.75: v1(850,1070) 850,1117.2 970,1237.2 970,1387.2 1000.28,1417.48 1000.28,1503.75 1000,1504.03 1000,1520 1075,1595 1075,1725 ; v1(1040,1760) 1075,1725 ; v1(1105,2865) 1057.56,2817.56 1057.56,2360.24 1080,2337.8 1080,1949.21 1091.38,1937.83 1091.38,1742.14 1075,1725.76 1075,1725
SCL: R1.2 U1.28 U4.12 | length 1410.5
  Top Layer w15.75: U4.12@624.84,2983.86 U4.12 624.84,3059.84 v1(630,3065)
  Top Layer w20: U1.28 970,2091.22 931.22,2130 931.22,2261.22 935.31,2265.32 937.3,2265.32 954.68,2282.7 954.68,2291.67 976.52,2313.5 v1(998.5,2313.5) R1.2
  Bottom Layer w20: v1(630,3065) 630,2954.42 998.5,2585.92 998.5,2458.89 976.69,2437.08 976.69,2335.31 v1(998.5,2313.5)
SDA: R1.3 U1.27 U4.13 | length 1429.1
  Top Layer w15.75: v1(595,3090) 599.25,3085.75 U4.13
  Top Layer w20: U1.27 1001.5,2099.14 959.09,2141.55 959.09,2247.69 982.56,2271.16 982.56,2273.14 991.43,2282.01 R1.3
  Bottom Layer w20: v1(595,3090) 597.87,3087.13 597.87,2947.13 970.63,2574.37 970.63,2470.44 948.82,2448.63 948.82,2316.18 v1(985,2280)
SN1: E1.7 U4.6 | length 635.9
  Top Layer w15.75: E1.7 471.65,3322.83 577.17,3322.83 778.39,3121.61 U4.6 U4.6@778.39,2983.86
SN2: E2.7 U4.8 | length 913.9
  Top Layer w15.75: v1(385,2865) 435,2865 498.62,2928.62 705.22,2928.62 727.2,2950.61 U4.8@727.2,2983.86
  Bottom Layer w15.75: v1(385,2865) 361.03,2865 337.44,2841.42 337.44,2580.14 340.55,2577.03 340.55,2474.41 E2.7
SN3: E3.7 U4.23 | length 1775.4
  Top Layer w15.75: E3.7 447.91,1592.91 v1(495,1640) ; v1(490,2720) 492.56,2722.56 492.56,2787.16 547.64,2842.24 727.64,2842.24 778.39,2791.49 U4.23@778.39,2716.14
  Bottom Layer w20: v1(490,2720) 487.87,2717.87 487.87,2656.55 559.25,2585.17 559.25,2292.17 530.16,2263.08 530.16,1971.32 469.57,1910.73 469.57,1834.27 525,1778.84 525,1670 v1(495,1640)
SN4: E4.7 U4.21 | length 2479.6
  Top Layer w15.75: v1@549.06,2680 549.06,2776.85 567.21,2795 708.07,2795 726.22,2776.85 726.22,2758.78 727.2,2757.8 U4.21@727.2,2716.14
  Top Layer w20: v1(425,1100) 425,1170 455,1200 455,1235 490,1270 v1(490,1495)
  Bottom Layer w20: E4.7 426.14,766.14 455,795 455,895 425.12,924.88 425.12,1099.88 v1(425,1100) ; v1(490,1495) 535,1540 535,1578.04 580.75,1623.79 580.75,1802.6 525.32,1858.03 525.32,1887.64 591.81,1954.13 591.81,2245.89 615,2269.08 615,2630 565,2680 v1(550,2680)
SN5: E5.7 U4.4 | length 881.5
  Top Layer w15.75: U4.4@829.57,2983.86 829.57,3077.97 916.59,3165 1554.68,3165 E5.7
SN6: E6.7 U4.27 | length 1026.1
  Top Layer w15.75: U4.27 880.75,2677.87 895,2663.62 974.78,2663.62 1052.23,2586.18 1387.79,2586.18 1436.3,2537.68 1436.3,2498.7 1455,2480 1480,2480 v1(1495,2495)
  Bottom Layer w20: v1(1495,2495) 1497.87,2492.13 1497.87,2332.13 1510.31,2319.68 E6.7
SN7: E7.7 U4.25 | length 1839.2
  Top Layer w15.75: U4.25@829.57,2731.14 829.57,2652.03 865.22,2616.38 955.22,2616.38 1036.59,2535 v1(1355,2535)
  Top Layer w20: v1(1525,1940) 1523.86,1938.86 1523.86,1542.28 E7.7
  Bottom Layer w20: v1(1355,2535) 1355,2020 1435,1940 v1(1525,1940)
SN8: E8.7 U4.2 | length 4028.7
  Top Layer w15.75: U4.2 880.75,3062.34 934.78,3116.38 1468.62,3116.38 1510,3075 1510,3028.41 1553.41,2985 1695,2985 1790,2890 v1(1790,2845)
  Bottom Layer w20: E8.7@1578.86,666.14 E8.7 1515,607.91 1515,530 1604.84,440.16 1762.36,440.16 1799.37,477.17 1799.37,2821.89 1790,2831.26 v1(1790,2845)
TXD: U1.31 U2.4 | length 125.9
  Top Layer w20: U2.4 860,2107.8 875.31,2092.48 875.31,2023.18 U1.31
pads on no net: J1. J1.3 J1.6 J2. J2.3 J2.6 R1.4 U1.7 U1.8 U1.19 U1.23 U1.24 U1.26 U4.11 U4.14

## Polygon pours and split planes (outlines as drawn)
GND on Top Layer "Top Layer-No Net" (solid, remove dead copper, pour order 2): 0,0 1968.5,0 1968.5,3937.01 0,3937.01
GND on Bottom Layer "Top Layer-No Net" (solid, remove dead copper, pour order 3): 0,0 1968.5,0 1968.5,3937.01 0,3937.01

## Keep-outs
Keep-Out Layer:
  the board outline again, w10

## Other copper
Top Layer:
  rectangle net 5V: 1235,1770 1425,2085
  pour cut-out: 1160,1365 1215,1365 1215,1350 1195,1330
  pour cut-out: 1295,795 1165,795 1205,835 1275,835
  pour cut-out: 472.44,984.25 479.77,984.25 479.77,994.77 472.44,994.77
  pour cut-out: 1340,1355 1340,1300 1335,1300 1310,1325
  pour cut-out: 1370,2265 1370,2185 1345,2185 1335,2195
  pour cut-out: 838.39,2426.69 888.31,2426.69 875,2440 865,2440
  pour cut-out: 850.54,2513.31 878.31,2513.31 865,2500
  pour cut-out: 755.09,2306.32 813.68,2306.32 795,2325 780,2325
  pour cut-out: 1555,2780 1570,2795 1605,2795
Bottom Layer:
  pour cut-out: 480,1530 450,1560 410,1560 410,1507.64 395.28,1492.91
  pour cut-out: 1340,1300 1340,1365 1339.31,1350.69 1310.69,1322.08

## Silkscreen, mask and mechanical layers (free items; w line width, h text height)
Top Overlay:
  text "Door 1" at 95,3450 h60
  text "Door 5" at 1610,2885 h60
  text "Door 2" at 70,2630 h60
  text "Door 6" at 1605,2045 h60
  text "Door 3" at 75,1795 h60
  text "Door 7" at 1605,1220 h60
  text "Door 4" at 65,955 h60
  text "Door 8" at 1605,395 h60
Bottom Overlay:
  drawing of 1366 lines, arcs and shapes, not listed
  text "open hardware" at 1084,2875 h78.74
  text "HSBNE" at 1490,2865 h78.74
  text "TheToolArmoury" at 1445,2760 h78.74
  text "https://github.com/hsbne" at 1430,2690 h78.74
  text "http://hsbne.org/" at 1430,2620 h78.74
  text "designed by" at 1390,2308.4 h78.74
  text "Luke Hovington" at 1390,2229.2 h78.74
  text "Joshua Hogendorn" at 1390,2150 h78.74
  text "LED Strip" at 1223.5,1905.83 h60 r180
  text "+12V" at 1720,1815 h60 r180
  text "DATA" at 1223.5,1805.83 h60 r180
  text "Door" at 725,1760 h60
  text "CLOCK" at 1223.5,1725.83 h60 r180
  text "GND" at 1725,1720 h60 r180
  text "Lock" at 725,1675 h60
  text "+12V" at 248.5,1660.83 h60
  text "LED K" at 1225,1620 h60 r180
  text "A" at 1725,1615 h60 r180
  text "Sense" at 730,1575 h60
  text "GND" at 243.5,1560.83 h60
  text "GND" at 1725,1525 h60 r180
  text "Sense" at 1238.5,1510.83 h60 r180
  text "A" at 243.5,1470.83 h60
  text "LED K" at 743.5,1465.83 h60
  text "+12V" at 1720,1425 h60 r180
  text "Lock" at 1243.5,1410.83 h60 r180
  text "GND" at 243.5,1365.83 h60
  text "CLOCK" at 745,1360 h60
  text "Door" at 1243.5,1325.83 h60 r180
  text "DATA" at 745,1280 h60
  text "+12V" at 248.5,1270.83 h60
  text "LED Strip" at 745,1180 h60
  text "Igor - v2" at 1760,385 h78.74
Top Solder:
  rectangle: 1100,2260 1120,2335
  rectangle: 1045,2260 1065,2340
  rectangle: 520,1520 620,1540
  rectangle: 525,1465 625,1485
  rectangle: 1305,1530 1410,1550
  rectangle: 1310,1475 1410,1495
  rectangle: 1340,785 1430,805
  rectangle: 1335,730 1435,750
  rectangle: 520,775 540,870
  rectangle: 575,780 595,860
  rectangle: 1140,2725 1235,2925
  rectangle: 1395,2725 1490,2925